# Altium PCB APD_flex_R02_V2.PcbDoc
Units mm, origin at the board's own origin, x right, y up, seen from the top; angles counter-clockwise.
Board outline 5.96 x 13.7 mm, 2 copper layers (Top Layer, Bottom Layer), stack 0.112 mm thick; 5 components, 6 nets, 18 pads, 25 vias.
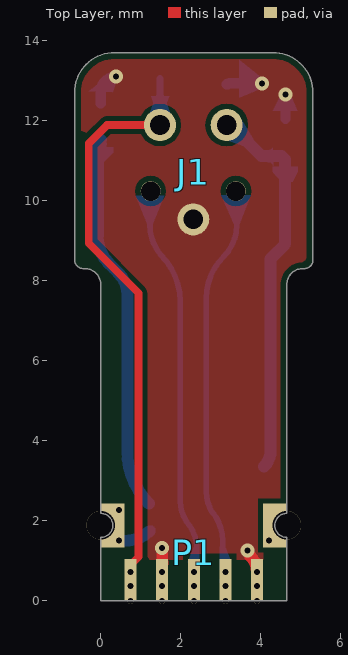
[diagram p0: Top Layer view]
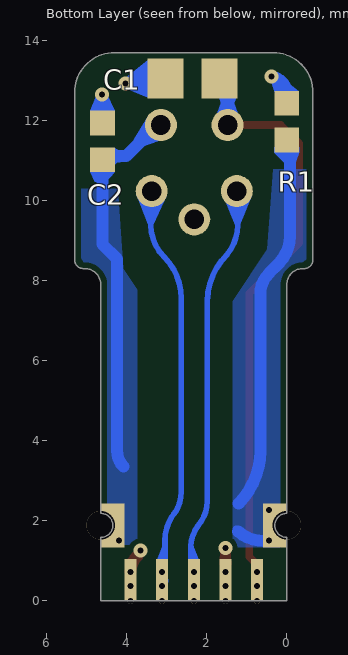
[diagram p1: Bottom Layer view, seen from below]

## Layer stack, top to bottom
Top Solder: solder mask 0.03, DuPont FR7001, Dk 3.5
Top Layer: signal copper 0.018
Dielectric 1: dielectric 0.076, DuPont AP8535R, Dk 3.4
Bottom Layer: signal copper 0.018
Bottom Solder: solder mask 0.03, DuPont FR7001, Dk 3.5

## Board outline
0,0 0,1.58 ccw(c0,1.88) 0,2.18 0,7.9 ccw(c-0.4,7.9) -0.4,8.3 -0.435,8.3 cw(c-0.435,8.52) -0.655,8.52 -0.655,12.7 cw(c0.345,12.7) 0.345,13.7 4.305,13.7 cw(c4.305,12.7) 5.305,12.7 5.305,8.519 cw(c5.086,8.519) 5.086,8.3 5.05,8.3 ccw(c5.05,7.9) 4.65,7.9 4.65,2.18 ccw(c4.65,1.88) 4.65,1.58 4.65,0

## Design rules (kind name [scope] priority, off if disabled: settings)
BoardOutlineClearance [All] p1: gap=0.254 ignorepadtopadclearanceinfootprint=FALSE except(0: Arc-SplitContinuation Track-SplitContinuation SMDPad-SplitContinuation THPad-SplitContinuation Via-SplitContinuation Fill-SplitContinuation Poly-SplitContinuation Region-SplitContinuation Text-SplitContinuation; 0.152: Poly-OutlineEdge)
Clearance [All] p1: gap=0.254 ignorepadtopadclearanceinfootprint=FALSE except(0: Arc-Hole Track-Hole SMDPad-Hole THPad-Hole Via-Hole Fill-Hole Poly-Hole Region-Hole Text-Hole; 0.128: Arc-Poly Track-Poly SMDPad-Poly THPad-Poly Via-Poly; 0.152: Arc-Arc Arc-Track Track-Track)
DiffPairsRouting [InDifferentialPair('RXOUT')] p1: maxlimit=2.17 minlimit=0.254 mostfreqgap=0.508 toplayer_minwidth=0.12 toplayer_maxwidth=0.2 toplayer_prefwidth=0.14 bottomlayer_minwidth=0.12 bottomlayer_maxwidth=0.2 bottomlayer_prefwidth=0.14 maxuncoupledlength=12.7
MinimumSolderMaskSliver [All] p1: minsoldermaskwidth=0.154
PolygonConnect [All] p1: connectstyle=Direct reliefconductorwidth=0.254 reliefentries=4 polygonreliefangle="90 Angle" airgapwidth=0.152
RoutingVias [All] p1: holewidth=0.3 width=0.3 viastyle="Through Hole" minholewidth=0.15 minwidth=0.15 maxholewidth=0.8 maxwidth=0.8
SolderMaskExpansion [All] p1: expansion=0.102
UnRoutedNet [All] p1: checkbadconnections=TRUE
Width [All] p1: maxlimit=0.254 minlimit=0.09 preferedwidth=0.19
27 further rules are at their usual default settings.

## Classes and differential pairs
differential pair RXOUT: +RXOUT_P -RXOUT_N

## Components (designator, comment, footprint, x,y, rotation, side; value= is the part's Value field where it differs from the comment)
C1 "100nF" 0603 2.352,13.05 r0 bottom
C2 "1µF" 0402 4.609,11.482 r90 bottom value=1uF
J1 "APD_ROSA_5PIN" "APD_5PINS - PIN F" 2.312,10.93 r0 top locked
P1 "APD_FLEX_PADS" "FLEX_7PADS - NEW_DESIGN" 0,0 r0 top
R1 "10k" 0402 -0.001,11.975 r90 bottom

## Footprints (in the part's own frame and the unit in brackets; to place one, negate y for a bottom-side part, rotate by r counter-clockwise, add the part's x,y. Pads: shape width x height; smd on the part's side, far side on the other; paste and mask are expansions set on the pad)
0402 [mm]
  rect 0.62x0.62 smd: 1(-0.46,0) 2(0.46,0)
  body extent -0.53,-0.28 0.53,0.27, height 0.4
0603 [mm]
  rect 0.9x1 smd: 1(-0.675,0) 2(0.675,0)
  body extent -0.87,-0.48 0.87,0.47, height 0.55
"APD_5PINS - PIN F" [mm]
  round 0.8 hole 0.49 paste+0 mask+0.12: 1(0.001,-1.4) 4(-0.832,0.958) 5(0.834,0.958)
  round 0.5 / inner round 0.36 / far side round 0.8 hole 0.49 mask+0.12: 2(-1.064,-0.692)
  round 0.5 / inner round 0.864 / far side round 0.8 hole 0.49 mask+0.12: 3(1.066,-0.692)
  body extent -5.93,8.55 -5.93,8.55, height 0.25
"FLEX_7PADS - NEW_DESIGN" [mm]
  rect 0.3x1.05 all layers, no hole mask-1: 1(3.905,0.52) 2(2.325,0.52) 3(3.115,0.52) 4(1.535,0.52) 7(0.745,0.52)
  rect 0.6x1.1 all layers, no hole mask-1: 5(4.356,1.88) 6(0.294,1.88)

## Part data
C1: library part CAP_100nF_0603, "100nF_0603", Manufacturer="Murata Electronics North America", Manufacturer Part Number=GRM188R72A104KA35D, Supplier Part Number=490-3285-2-ND, Voltage=100V, Supplier=Digi-Key
C2: library part CAP_1µF_0402, "1µF_0402", Manufacturer="Samsung Electro-Mechanics", Manufacturer Part Number=CL05A105KP5NNNC, Supplier Part Number=1276-1076-2-ND, Voltage=10V, Supplier=Digi-Key
R1: library part RES_10k_0402, "10K_0402_Termistor", Manufacturer="Vishay BC Components", Manufacturer Part Number=NTCS0402E3103FLT, Supplier Part Number=BC2534TR-ND, Supplier=Digi-Key

## Via types
v1: diameter 0.15, hole 0.15, Top Layer to Bottom Layer, tented both sides, 18 vias
v2: diameter 0.35, hole 0.15, Top Layer to Bottom Layer, tented both sides, 5 vias
v3: diameter 0.712, hole 0.712, Top Layer to Bottom Layer, tented both sides, 2 vias

## Nets (pads, with @x,y where several pads share a name; then routed paths per layer and width w, separated by ;. In a path a pad name is that pad's centre, name@x,y a point inside that pad or via, vN(x,y) a via of type N, cw(c..) or ccw(c..) an arc to the next point about the centre after c; other vN are vias at no path point)
GND: C1.2 C2.2 J1.1 P1.1 P1.4 R1.2 | length 3.6
  Top Layer w0.19: v2@3.658,1.199 v2@3.736,1.12
  Top Layer w0.254: v1(1.535,0.712) v2(1.535,1.312)
  Top Layer w0.3: v2@3.736,1.12 cw(c3.327,0.712) v1(3.905,0.712)
  Bottom Layer w0.254: R1.2 -0.001,12.72 cw(c0.383,12.72) v2(0.383,13.103) ; C1.2@3.146,12.908 3.177,12.908 3.202,12.932 v2(4.034,12.932) ; C2.2@4.62,12.042 v2(4.62,12.649)
  other v1: 1.535,-0.012 3.905,-0.012 1.535,0.369 3.905,0.369
  other v2: 3.662,1.254
NetP1_6: P1.6 R1.1 | length 10.5
  Bottom Layer w0.19: 1.17,1.677 ccw(c0.746,2.101) 1.214,1.727 ccw(c0.568,2.478) 1.268,1.777
  Bottom Layer w0.254: -0.076,9.109 ccw(c0.902,9.109) -0.071,9.007 ; 1.209,2.423 1.214,2.418
  Bottom Layer w0.3: -0.08,9.109 ccw(c0.865,9.105) 0.197,8.437 ; -0.076,9.109 -0.076,11.34 R1.1@-0.001,11.415 ; R1.1@-0.076,11.44 cw(c-0.001,11.44) R1.1 ; 0.197,8.432 0.447,8.18 cw(c-0.076,7.66) 0.662,7.66 0.662,3.744 ccw(c2.53,3.744) 1.209,2.423 ; 0.327,8.302 cw(c-0.483,7.492) 0.328,8.3 ; P1.6@0.568,1.487 ccw(c0.568,2.478) 1.214,1.727
  other v1: 0.45,1.5 0.45,2.26
  other v3: 0,1.88
RXOUT_N: J1.2 P1.2 | length 14.2
  Bottom Layer w0.14: J1.2@1.231,10.243 1.231,9.379 ccw(c2.37,9.379) 1.49,8.656 cw(c0.283,7.449) 1.989,7.483 ; 1.988,3.317 1.988,7.449 1.988,2.484 ccw(c2.911,2.484) 2.223,1.87 ; 2.216,1.881 cw(c1.474,1.332) 2.223,1.87 ; P1.2 ccw(c2.153,0.692) 2.396,0.692 2.396,1.332 ccw(c1.474,1.332) 2.397,1.348 ccw(c1.474,1.332) 2.223,1.87 ; P1.2@2.373,0.195 ccw(c2.346,0.222) P1.2@2.384,0.222
  other v1: 2.325,-0.012 2.325,0.369 2.325,0.712
RXOUT_P: J1.3 P1.3 | length 14.5
  Bottom Layer w0.14: 2.636,2.716 2.636,7.553 ; 2.636,3.317 2.636,7.553 ; 2.638,2.716 ccw(c3.561,2.716) 2.786,2.216 ; 2.819,2.167 cw(c3.561,2.716) 2.786,2.216 ; P1.3@3.032,0.509 ccw(c3.172,0.509) 3.073,0.41 3.114,0.369 v1(3.115,0.369) ; P1.3 cw(c3.287,0.692) 3.044,0.692 3.044,1.5 ccw(c1.928,1.5) 2.786,2.216 ; J1.3@3.399,10.23 3.399,9.395 cw(c2.26,9.395) 3.066,8.589 ccw(c4.101,7.553) 2.636,7.553
  other v1: 3.115,-0.012 3.115,0.712
VAPD: C1.1 J1.4 P1.7 | length 14.7
  Top Layer w0.19: P1.7@0.745,0.445 P1.7@0.745,0.469 ; P1.7 0.745,0.895 0.943,1.093 0.943,7.685 -0.306,8.934 -0.306,11.427 0.155,11.889 J1.4
  Bottom Layer w0.18: J1.4@1.481,11.899 C1.1@1.481,13.05
  other v1: 0.745,-0.012 0.745,0.369 0.745,0.712
VCC: C2.1 J1.5 P1.5 | length 9.7
  Bottom Layer w0.19: P1.5@4.321,1.915 P1.5 ; P1.5@4.356,1.915 P1.5@4.356,1.917
  Bottom Layer w0.3: J1.5 3.242,11.889 4.021,11.11 4.521,11.11 C2.1 4.609,8.909 4.244,8.544 4.244,3.744 cw(c3.692,3.744) 4.082,3.353
  other v1: 4.2,1.5
  other v3: 4.65,1.88

## Polygon pours and split planes (outlines as drawn)
GND on Top Layer "Top Layer-No Net" (solid, remove dead copper, pour order 3): 0,1.023 0,1.58 ccw(c0,1.88) 0,2.18 0,7.9 ccw(c-0.4,7.9) -0.4,8.3 -0.655,8.3 -0.655,12.7 cw(c0.345,12.7) 0.345,13.7 4.305,13.7 cw(c4.305,12.7) 5.305,12.7 5.305,8.3 5.05,8.3 ccw(c5.05,7.9) 4.65,7.9 4.65,2.18 ccw(c4.65,1.88) 4.65,1.58 4.65,1.023
VCC on Bottom Layer "Bottom Layer-VCC" (solid, pour order 7): 4.558,7.764 4.712,8.14 5.02,8.379 5.291,8.781 5.213,10.296 4.23,10.296 4.082,8.296 3.735,7.772 3.735,1.393 4.558,1.393
NetP1_6 on Bottom Layer "Bottom Layer-NetP1_6" (solid, pour order 5): 1.345,7.483 0.483,8.781 0.336,10.781 -0.648,10.781 -0.648,8.5 -0.591,8.345 -0.13,8.213 0.007,7.899 0.007,1.329 1.345,1.329

## Other copper
Top Layer:
  pour cut-out: 4.056,1.232 4.432,1.232 4.432,0.955 4.056,0.955
  pour cut-out: 2.557,1.175 2.908,1.175 2.908,1.024 2.557,1.024
Bottom Layer:
  region net VCC: 4.305,11.323 cw(c4.156,11.467) 4.156,11.26 4.168,10.961 cw(c4.185,10.837) 4.31,10.846
  region net VCC: 4.035,3.29
  region net VCC: 4.037,3.343
  region net VCC: 4.037,3.343
  region net NetP1_6: 0.15,1.3
  region net NetP1_6: 0.17,1.3
  region net VCC: 4.919,10.84 4.299,10.84 4.299,10.723 4.308,10.7 4.51,10.47 4.8,10.47 4.919,10.72
  region net NetP1_6: -0.31,11.33 0.31,11.33 0.31,11.2 0.07,10.96 -0.22,10.96 -0.31,11.21
  region: -0.3,11.37
  region net VCC: 2.98,11.586 3.48,12.086 3.48,12.09 3.82,11.52 3.65,11.34 2.98,11.57

## Silkscreen, mask and mechanical layers (free items; w line width, h text height)
Mechanical 1:
  the board outline again, w0.05
Mechanical 2:
  lines w0.013: -0.655,8.3 -0.655,12.7 cw(c0.345,12.7) 0.345,13.7 4.305,13.7 cw(c4.305,12.7) 5.305,12.7 5.305,8.3 -0.655,8.3
Drill Drawing:
  circle w0.254: c-10.886,-10.608 r0.468
  lines w0.254: -11.353,-8.738 -11.12,-8.738 -11.12,-8.971 -10.652,-8.971 -10.652,-8.738 -10.418,-8.738 -10.418,-8.27 -10.652,-8.27 -10.652,-8.036 -11.12,-8.036 -11.12,-8.27 -11.353,-8.27 -11.353,-8.738 ; -11.353,-6.867 -10.418,-6.867 -10.418,-5.932 -11.353,-5.932 -11.353,-6.867
  lines w0.381: -12.228,-11.707 16.296,-11.707 ; -12.228,-5.394 16.296,-5.394 ; -6.942,-13.811 -6.942,-3.29 ; -2.57,-13.811 -2.57,-3.29 ; 5.665,-13.811 5.665,-3.29 ; 9.777,-13.811 9.777,-3.29 ; -12.228,-13.811 16.296,-13.811 16.296,-3.29 -12.228,-3.29 -12.228,-13.811
  text "Symbol" at -10.965,-4.763 h1.44
  text "Count" at -6.311,-4.763 h1.44
  text "Hole Size" at -1.939,-4.763 h1.44
  text "Plated" at 6.296,-4.763 h1.44
  text "Hole Type" at 10.408,-4.763 h1.44
  text "2" at -6.311,-6.867 h1.2
  text "28.03mil (0.7mm)" at -1.939,-6.867 h1.2
  text "PTH" at 6.296,-6.867 h1.2
  text "Round" at 10.408,-6.867 h1.2
  text "5" at -6.311,-8.971 h1.2
  text "19.29mil (0.5mm)" at -1.939,-8.971 h1.2
  text "PTH" at 6.296,-8.971 h1.2
  text "Round" at 10.408,-8.971 h1.2
  text "23" at -6.311,-11.076 h1.2
  text "5.91mil (0.2mm)" at -1.939,-11.076 h1.2
  text "PTH" at 6.296,-11.076 h1.2
  text "Round" at 10.408,-11.076 h1.2
  text "30 Total" at -6.311,-13.18 h1.2